# Altium PCB SDA7123.PcbDoc
Units mil, origin at the board's own origin, x right, y up, seen from the top; angles counter-clockwise.
Board outline 1968.5 x 1771.65 mil, 2 copper layers (Top Layer, Bottom Layer); 23 components, 43 nets, 139 pads, 102 vias.
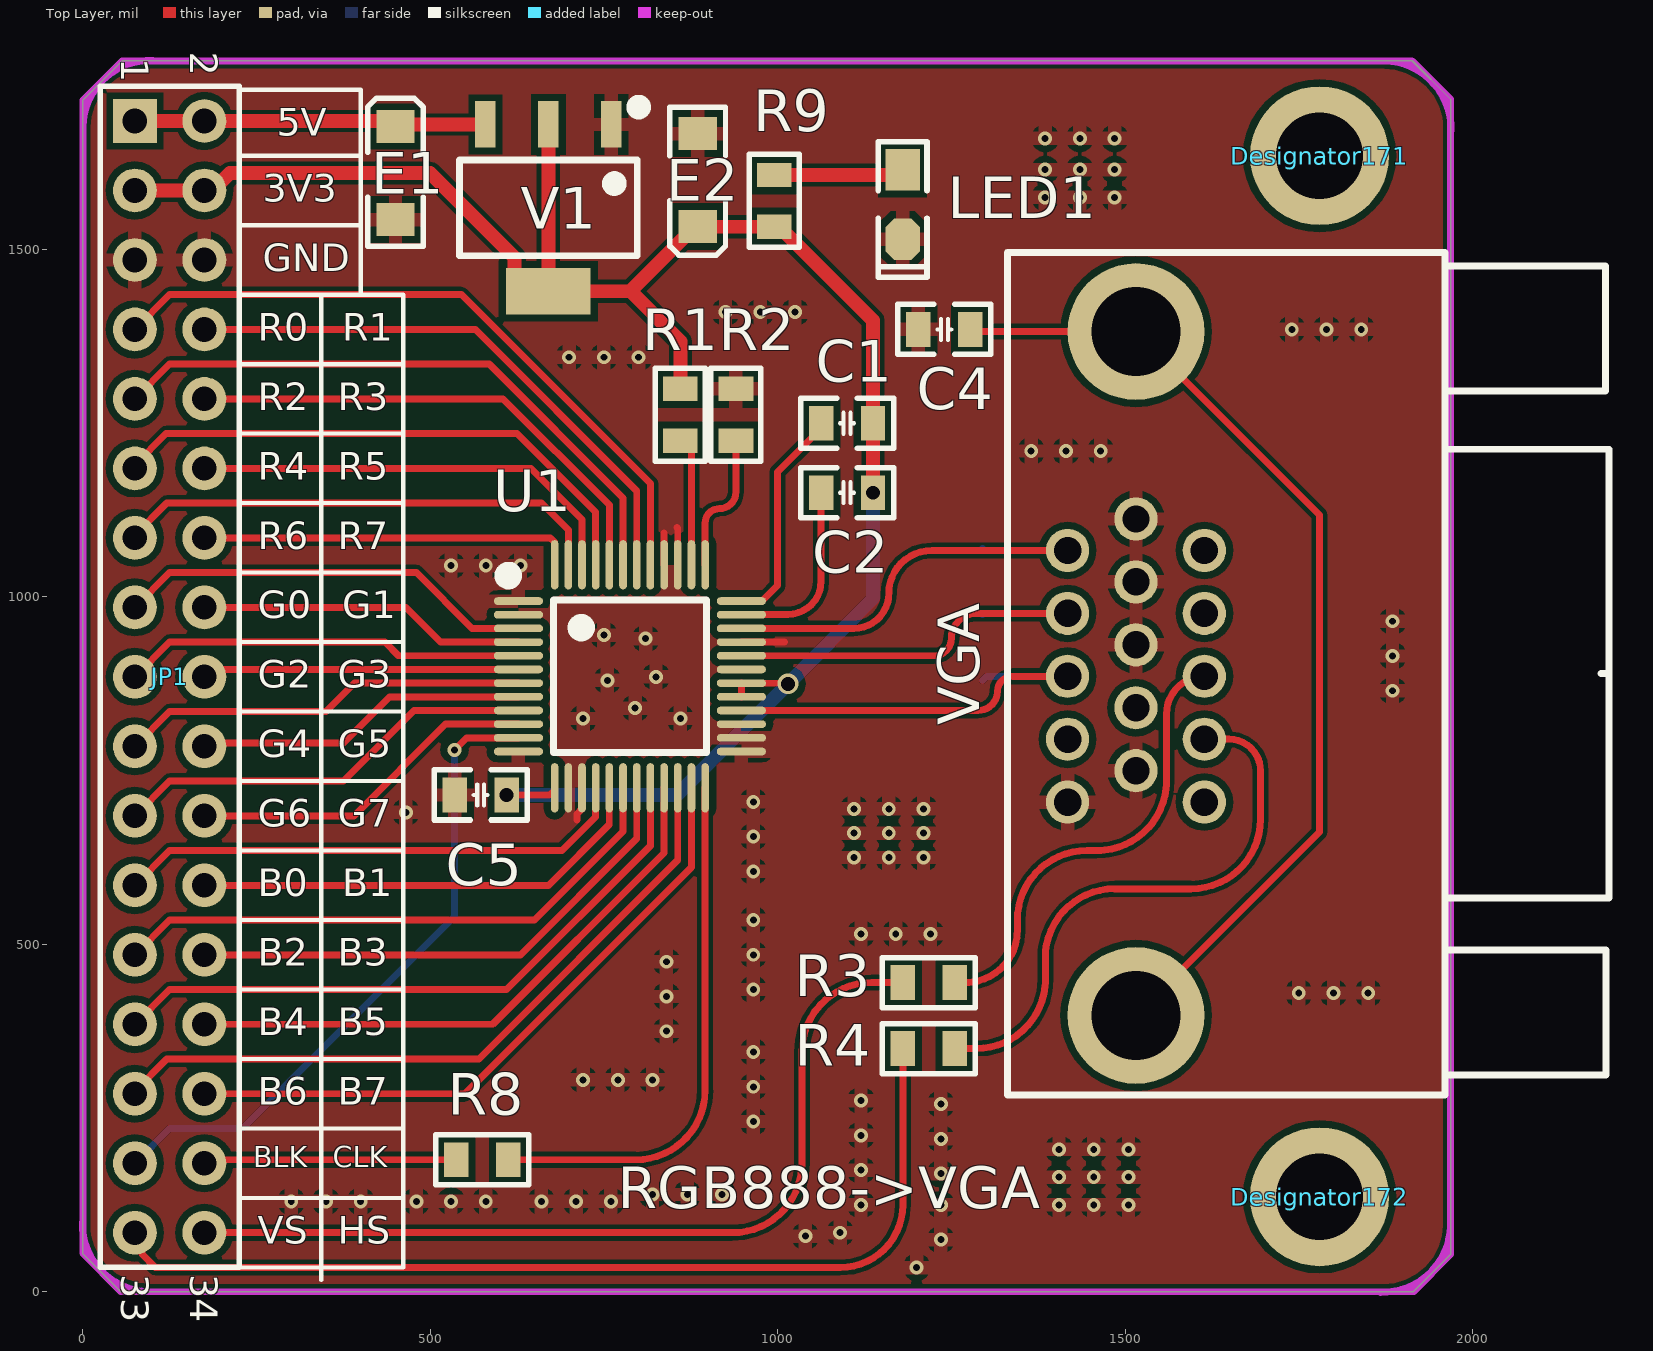
[diagram p0: Top Layer view]
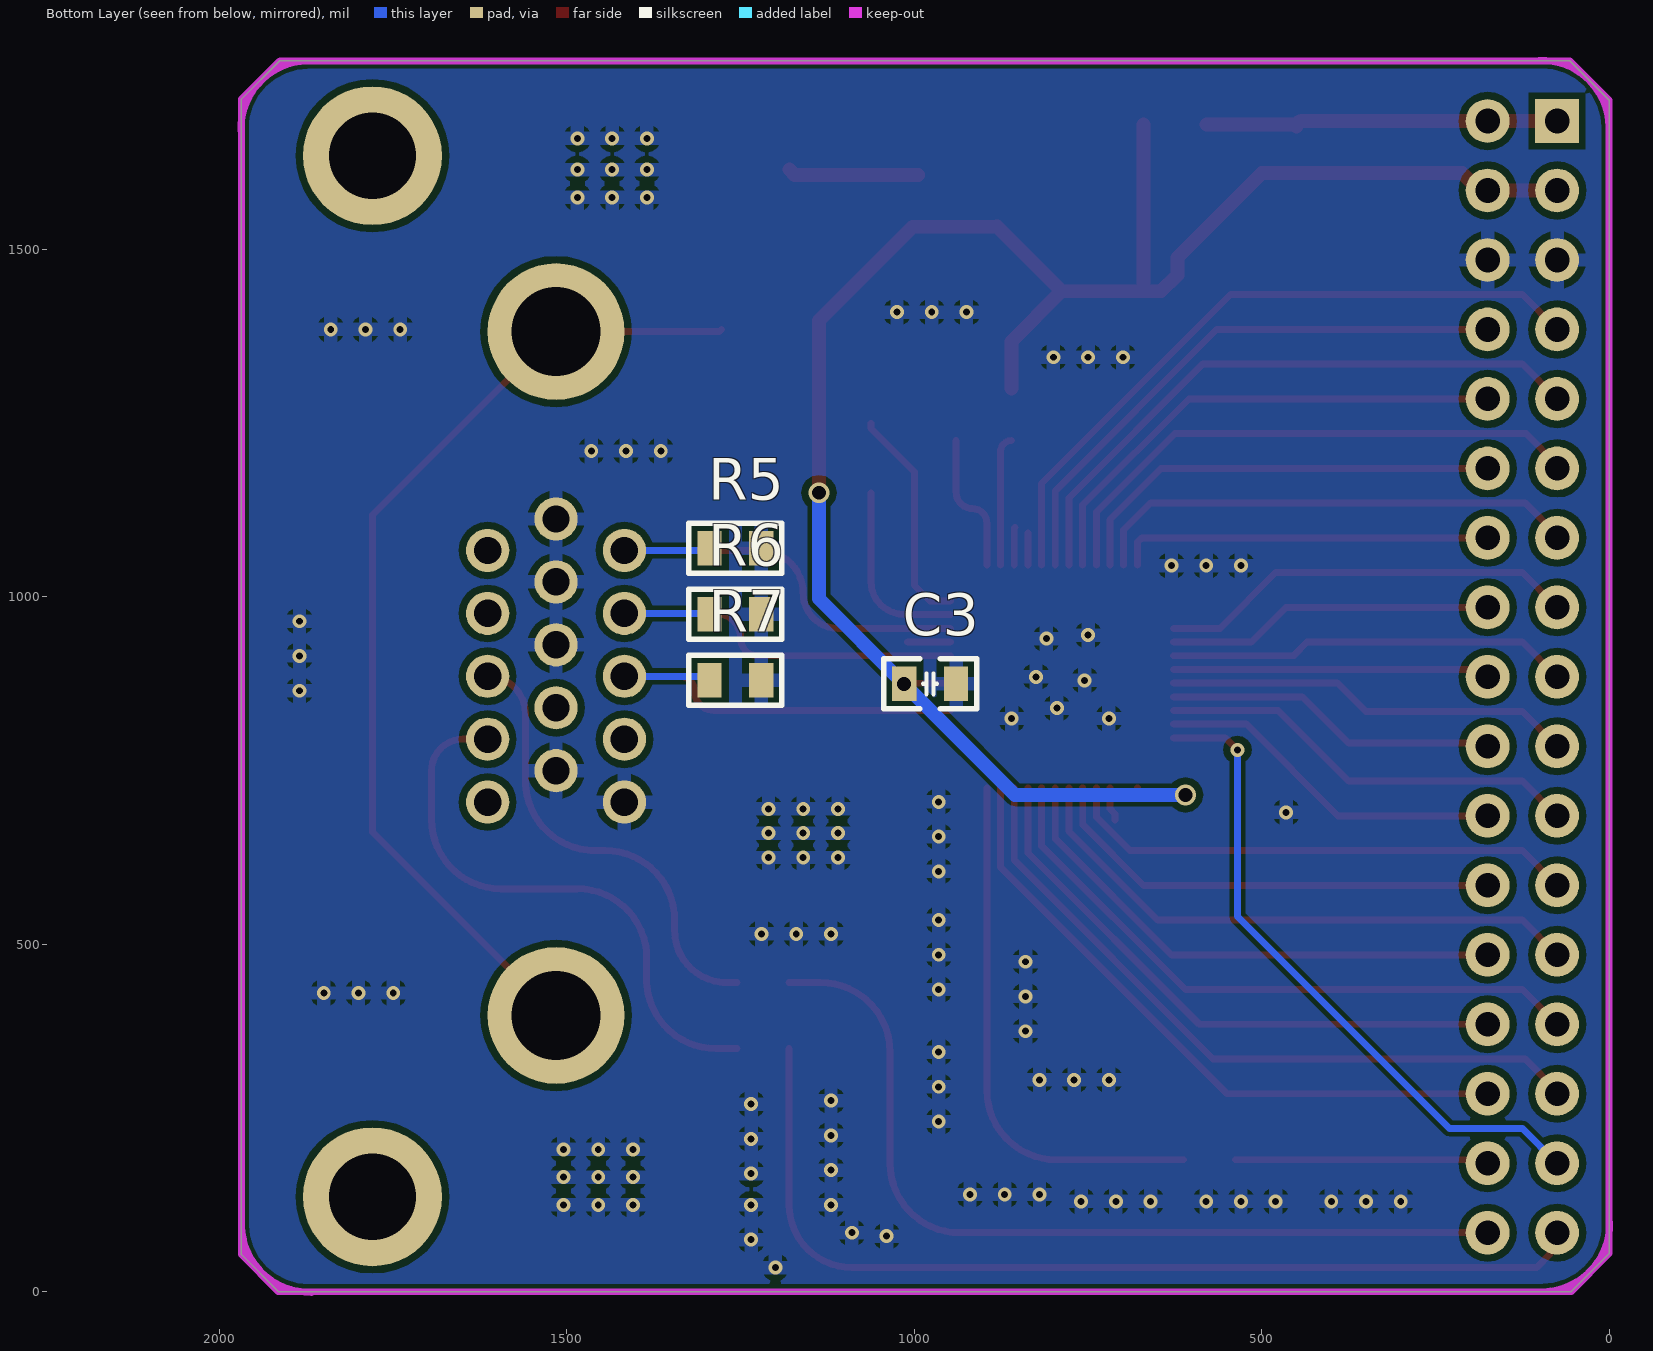
[diagram p1: Bottom Layer view, seen from below]

## Layer stack, top to bottom
Top Solder: solder mask 0.4, Solder Resist, Dk 3.5
Top Layer: signal copper 1.4
Dielectric 1: dielectric 12.6, FR-4, Dk 4.8
Bottom Layer: signal copper 1.4
Bottom Solder: solder mask 0.4, Solder Resist, Dk 3.5

## Board outline
0,55 55,0 1915,0 1968.5,53.5 1968.5,1716.5 1913.35,1771.65 56.65,1771.65 0,1715

## Design rules (kind name [scope] priority, off if disabled: settings)
Clearance [All] p1: gap=10 ignorepadtopadclearanceinfootprint=TRUE except(0: Arc-Hole Track-Hole SMDPad-Hole THPad-Hole Via-Hole Fill-Hole Poly-Hole Region-Hole Text-Hole; 6: Arc-Arc Arc-Track Arc-SMDPad Arc-THPad Arc-Via Arc-Fill Arc-Poly Arc-Region Arc-Text Track-Track Track-SMDPad Track-THPad Track-Via Track-Fill Track-Poly Track-Region Track-Text)
PlaneConnect [All] p1: planeconnectstyle=Relief reliefexpansion=20 reliefentries=4 reliefconductorwidth=20 reliefairgap=10
PolygonConnect [All] p1: connectstyle=Relief reliefconductorwidth=20 reliefentries=4 polygonreliefangle="90 Angle" airgapwidth=10
RoutingVias [All] p1: holewidth=28 width=50 viastyle="Through Hole" minholewidth=28 minwidth=50 maxholewidth=28 maxwidth=50
SolderMaskExpansion [All] p1: expansion=4 istentingtop=FALSE
Width [All] p1: maxlimit=100 minlimit=10 preferedwidth=10
29 further rules are at their usual default settings.

## Classes and differential pairs
component class SDA7123: C1 C2 C3 C4 C5 E1 E2 JP1 LED1 R1 R2 R3 R4 R5 R6 R7 R8 R9 U1 V1 VGA

## Components (designator, comment, footprint, x,y, rotation, side; value= is the part's Value field where it differs from the comment)
C1 "104" "C 0805_L" 1100,1250 r0 top
C2 "104" "C 0805_L" 1100,1150 r0 top
C3 "104" "C 0805_L" 977.4,875 r0 bottom
C4 "104" "C 0805_L" 1240,1385 r180 top
C5 "104" "C 0805_L" 572.6,715 r180 top
Designator171 "Comment" "M3 125X200" 1780,1635 r0 top
Designator172 "Comment" "M3 125X200" 1780,136.65 r0 top
E1 "10uF/6.3V" "CD A(3216)" 450,1610 r270 top
E2 "10uF/6.3V" "CD A(3216)" 885,1600 r90 top
JP1 "Header 2X11" HDR2.54-LI-2x17P 125,885 r270 top locked
LED1 "红色" "LED 0805B" 1180,1565 r270 top
R1 "4.7k" "R 0805_L" 860,1262.4 r90 top
R2 "510" "R 0805_L" 940,1262.4 r90 top
R3 "75R" "R 0805_L" 1217.6,445 r0 top
R4 "75R" "R 0805_L" 1217.6,350 r0 top
R5 "75R" "R 0805_L" 1257.6,1070 r0 bottom
R6 "75R" "R 0805_L" 1257.6,975 r0 bottom
R7 "75R" "R 0805_L" 1257.6,880 r0 bottom
R8 "33R" "R 0805_L" 575,190 r180 top
R9 "1k" "R 0805_L" 995,1570 r90 top
U1 "SDA7123" "LQFP48 7X7_N" 787.4,885.83 r270 top locked
V1 "AMS1117-3V3" SOT223_L 670,1560 r180 top
VGA "D Connector 15" VGA15b 1417.32,885.83 r270 top locked (schematic designator J1)

## Footprints (in the part's own frame and the unit in brackets; to place one, negate y for a bottom-side part, rotate by r counter-clockwise, add the part's x,y. Pads: shape width x height; smd on the part's side, far side on the other; paste and mask are expansions set on the pad)
"C 0805_L" [mil] "无极性贴片电容                                        淘宝ID:黄晶宝石"
  rect 35x50 smd: 1(-37.4,0) 2(37.4,0)
  silkscreen extent -67,-36 67,36, body extent -39,-24 39,24, height 20
"CD A(3216)" [mm] "长3.2mm，宽1.6mm，厚1.6mm      淘宝ID:黄晶宝石"
  rect 1.2x1.4 smd: 1(-1.7,0) 2(1.7,0)
  silkscreen extent -2.74,-1.02 2.67,1.02, body extent -1.6,-0.8 1.6,0.8, height 1.6
HDR2.54-LI-2x17P [mm] "双排排针，17x2脚  淘宝ID:黄晶宝石   店铺网址:https://shop463601444.taobao.com"
  rect 1.6x1.6 hole 0.9: 1(-20.32,-1.27)
  round 1.6 hole 0.9: 2(-20.32,1.27) 3(-17.78,-1.27) 4(-17.78,1.27) 5(-15.24,-1.27) 6(-15.24,1.27) 7(-12.7,-1.27) 8(-12.7,1.27) 9(-10.16,-1.27) 10(-10.16,1.27) 11(-7.62,-1.27) 12(-7.62,1.27) 13(-5.08,-1.27) 14(-5.08,1.27) 15(-2.54,-1.27) 16(-2.54,1.27) 17(0,-1.27) 18(0,1.27) 19(2.54,-1.27) 20(2.54,1.27) 21(5.08,-1.27) 22(5.08,1.27) 23(7.62,-1.27) 24(7.62,1.27) 25(10.16,-1.27) 26(10.16,1.27) 27(12.7,-1.27) 28(12.7,1.27) 29(15.24,-1.27) 30(15.24,1.27) 31(17.78,-1.27) 32(17.78,1.27) 33(20.32,-1.27) 34(20.32,1.27)
  silkscreen extent -21.59,-2.54 21.59,2.54, body extent -21.59,-2.54 21.59,2.54, height 8.5
"LED 0805B" [mil] "蓝色0805LED                                    淘宝ID:黄晶宝石"
  rect 60x50 smd: 1(-50,0)
  oct 60x50 smd: 2(50,0)
  silkscreen extent -90,-35 105,35, body extent -39,-25 39,25, height 32
"LQFP48 7X7_N" [mm] "48脚，体宽7x7mm，脚距0.5mm"
  oval 0.279x1.8 smd: 1(-2.75,-4.075) 2(-2.25,-4.075) 3(-1.75,-4.075) 4(-1.25,-4.075) 5(-0.75,-4.075) 6(-0.25,-4.075) 7(0.25,-4.075) 8(0.75,-4.075) 9(1.25,-4.075) 10(1.75,-4.075) 11(2.25,-4.075) 12(2.75,-4.075) 25(2.75,4.075) 26(2.25,4.075) 27(1.75,4.075) 28(1.25,4.075) 29(0.75,4.075) 30(0.25,4.075) 31(-0.25,4.075) 32(-0.75,4.075) 33(-1.25,4.075) 34(-1.75,4.075) 35(-2.25,4.075) 36(-2.75,4.075)
  oval 1.8x0.279 smd: 13(4.075,-2.75) 14(4.075,-2.25) 15(4.075,-1.75) 16(4.075,-1.25) 17(4.075,-0.75) 18(4.075,-0.25) 19(4.075,0.25) 20(4.075,0.75) 21(4.075,1.25) 22(4.075,1.75) 23(4.075,2.25) 24(4.075,2.75) 37(-4.075,2.75) 38(-4.075,2.25) 39(-4.075,1.75) 40(-4.075,1.25) 41(-4.075,0.75) 42(-4.075,0.25) 43(-4.075,-0.25) 44(-4.075,-0.75) 45(-4.075,-1.25) 46(-4.075,-1.75) 47(-4.075,-2.25) 48(-4.075,-2.75)
  silkscreen extent -3.93,-4.69 2.79,2.79, body extent -4.5,-4.5 4.5,4.5, height 1.45
"M3 125X200" [mil] "M3螺丝孔，孔125Mil，焊盘200Mil"
  round 200 hole 125: 1(0,0)
"R 0805_L" [mil] "1/8W贴片电阻"
  rect 35x50 smd: 1(-37.4,0) 2(37.4,0)
  silkscreen extent -67,-36 67,36, body extent -39,-25 39,25, height 20
SOT223_L [mm] "6.4x7x1.6mm(长宽高)"
  rect 0.75x1.7 smd: 1(-2.3,-3.048) 2(0,-3.048) 3(2.3,-3.048)
  rect 3.1x1.7 smd: 2(0,3.048)
  silkscreen extent -3.5,-3.88 3.25,1.75, body extent -3.25,-3.51 3.25,3.51, height 1.65
VGA15b [mm] "15针通讯接口"
  round 1.58 hole 1: 1(-4.6,0) 2(-2.3,0) 3(0,0) 4(2.3,0) 5(4.6,0) 6(-5.75,2.5) 7(-3.45,2.5) 8(-1.15,2.5) 9(1.15,2.5) 10(3.45,2.5) 11(-4.6,5) 12(-2.3,5) 13(0,5) 14(2.3,5) 15(4.6,5)
  round 5 hole 3.25: 16(-12.6,2.5) 17(12.4,2.5)
  silkscreen extent -15.5,-2.2 15.3,19.8, body extent -15.66,-0.87 15.15,20.23, height 12.77

## Part data
C1 C2 C3 C4 C5: library part C, "贴片电容", BOM名称=无极性贴片电容, 联系售后=https://shop463601444.taobao.com, 淘宝ID="封装库来自淘宝 ID：黄晶宝石"
E1 E2: library part CT, "贴片钽电容", BOM名称=贴片钽电容, 联系售后=https://shop463601444.taobao.com, 淘宝ID="封装库来自淘宝 ID：黄晶宝石"
JP1: library part "Header 17X2", "17*2P接插件", BOM名称=17*2P接插件, 版权归属="封装库来自淘宝 ID：黄晶宝石", 学习资源=https://shop463601444.taobao.com
LED1: library part LED-SMD, "贴片LED", BOM名称=贴片LED, 版权归属="封装库来自淘宝 ID：黄晶宝石", 学习资源=https://shop463601444.taobao.com
R1 R2 R3 R4 R5 R6 R7 R8 R9: library part R, "贴片电阻", BOM名称=贴片电阻, 版权归属="来自淘宝 ID：黄晶宝石", 联系售后=https://shop463601444.taobao.com
V1: library part AMS1117, "三端稳压芯片", BOM名称=稳压芯片, 欢迎光临淘宝店铺=https://shop463601444.taobao.com, 淘宝ID="封装库来自淘宝 ID：黄晶宝石"
VGA: "VGA通讯端口", BOM名称=VGA通讯端口, 版权归属="封装库来自淘宝 ID：黄晶宝石", 学习资源=https://shop463601444.taobao.com

## Via types
v1: diameter 20, hole 10, Top Layer to Bottom Layer, tented both sides, 99 vias
v2: diameter 30, hole 20, Top Layer to Bottom Layer, tented both sides, 3 vias

## Nets (pads, with @x,y where several pads share a name; then routed paths per layer and width w, separated by ;. In a path a pad name is that pad's centre, name@x,y a point inside that pad or via, vN(x,y) a via of type N, cw(c..) or ccw(c..) an arc to the next point about the centre after c; other vN are vias at no path point)
3V3: C1.2 C2.2 C3.2 C5.1 E2.1 JP1.3 JP1.4 R1.2 R9.1 U1.13 U1.29 U1.30 V1.2 | length 2869.4
  Top Layer w10: v2(610,715) 668.76,715 ccw(c668.76,725.38) U1.13 ; U1.29 U1.30 948.04,875.79 1014.21,875.79 v2(1015,875)
  Top Layer w20: JP1.3 186.63,1585 211.63,1610 500,1610 621.54,1488.46 621.54,1463.46 645.01,1440 V1.2@670,1440 ; V1.2@670,1680 V1.2@670,1440 ; R1.2 860,1367.99 787.99,1440 ; v2(1137.4,1150) C1.2 1137.4,1397.7 1002.27,1532.83 881.3,1532.83 881.06,1533.07 787.99,1440 ; V1.2@670,1440 787.99,1440
  Bottom Layer w20: v2(610,715) 855,715 v2(1015,875) 1137.4,997.4 v2(1137.4,1150)
+5: E1.1 JP1.1 JP1.2 V1.3 | length 510.8
  Top Layer w20: JP1.1 JP1.2 441.93,1685 cw(c441.93,1676.93) E1.1 cw(c453.07,1676.93) 453.07,1680 V1.3
B0: JP1.23 U1.16 | length 746
  Top Layer w10: JP1.23 125,635 690,635 738.19,683.19 U1.16
B1: JP1.24 U1.17 | length 671.8
  Top Layer w10: JP1.24 670,585 757.68,672.68 757.68,725.19 U1.17
B2: JP1.25 U1.18 | length 838.9
  Top Layer w10: JP1.25 125,535 650,535 777.56,662.56 U1.18
B3: JP1.26 U1.19 | length 764.7
  Top Layer w10: JP1.26 630,485 797.24,652.24 U1.19
B4: JP1.27 U1.20 | length 931.8
  Top Layer w10: JP1.27 125,435 610,435 816.74,641.74 816.74,725.19 U1.20
B5: JP1.28 U1.21 | length 857.5
  Top Layer w10: JP1.28 590,385 836.42,631.42 836.42,725.19 U1.21
B6: JP1.29 U1.22 | length 1027.1
  Top Layer w10: JP1.29 75,289.14 120.86,335 570,335 856.3,621.3 U1.22
B7: JP1.30 U1.23 | length 950.4
  Top Layer w10: JP1.30 550,285 875.98,610.98 U1.23
BLK: JP1.31 U1.11 | length 946.1
  Top Layer w10: v1(535,780) 552.24,797.24 U1.11
  Bottom Layer w10: JP1.31 125,235 230,235 535,540 v1(535,780)
CLK: JP1.32 R8.2 | length 365.5
  Top Layer w10: JP1.32 cw(c180,185) 180,190 R8.2
G0: JP1.15 U1.3 | length 605.9
  Top Layer w10: JP1.15 125,1035 480,1035 560.28,954.72 U1.3
G1: JP1.16 U1.4 | length 472.6
  Top Layer w10: JP1.16 465,985 514.96,935.04 U1.4
G2: JP1.17 U1.5 | length 580.8
  Top Layer w10: JP1.17 125,935 435,935 454.65,915.35 U1.5
G3: JP1.18 U1.6 | length 456.4
  Top Layer w10: JP1.18 189.34,885 200.01,895.67 U1.6
G4: JP1.19 U1.7 | length 589.6
  Top Layer w10: JP1.19 125,835 350,835 390.98,875.98 U1.7
G5: JP1.20 U1.8 | length 481.5
  Top Layer w10: JP1.20 180,790 375,790 441.3,856.3 U1.8
G6: JP1.21 U1.9 | length 614.8
  Top Layer w10: JP1.21 125,735 375,735 476.61,836.61 U1.9
G7: JP1.22 U1.10 | length 506.6
  Top Layer w10: JP1.22 390.25,685 522.18,816.93 U1.10
GND: C3.1 C4.2 C5.2 E1.2 E2.2 JP1.5 JP1.6 LED1.2 R2.2 R5.1 R6.1 R7.1 U1.1 U1.2 U1.12 U1.14 U1.15 U1.25 U1.26 U1.27 U1.31 U1.33 U1.39 U1.40 V1.1 VGA.5 VGA.6 VGA.7 VGA.8 VGA.10 | length 211.9
  Top Layer w10: 711.1,678.73 711.1,687.77 718.5,695.17 U1.15 ; U1.40 836.61,1092.01 ; 855,1100 856.3,1098.7 U1.39 ; U1.33 1009.96,935.04 1010,935
  other v1: 1200,35 1235,75 1040,80 1090,85 1120,125 1235,125 1405,125 1455,125 1505,125 300,130 350,130 400,130 480,130 530,130 580,130 660,130 710,130 760,130 820,140 870,140 920,140 1405,165 1455,165 1505,165 1235,170 1120,175 1405,205 1455,205 1505,205 1235,220 1120,225 965,245 1235,270 1120,275 965,295 720,305 770,305 820,305 965,345 840,375 840,425 1750,430 1800,430 1850,430 965,435 840,475 965,485 1120,515 1170,515 1220,515 965,535 965,605 1110,625 1160,625 1210,625 965,655 1110,660 1160,660 1210,660 465,690 1110,695 1160,695 1210,695 965,705 720,825 860,825 795,840 1885,865 755,880 825,885 1885,915 810,940 750,945 1885,965 530,1045 580,1045 630,1045 1365,1210 1415,1210 1465,1210 700,1345 750,1345 800,1345 1740,1385 1790,1385 1840,1385 925,1410 975,1410 1025,1410 1385,1575 1435,1575 1485,1575 1385,1615 1435,1615 1485,1615 1385,1660 1435,1660 1485,1660
NetC1_1: C1.1 U1.36 | length 321
  Top Layer w10: U1.36 977.78,994.09 1000,1016.31 1000,1179.9 1062.6,1242.5 C1.1
NetC2_1: C2.1 U1.35 | length 269.9
  Top Layer w10: U1.35 947.85,975 1015,975 ccw(c1015,1022.6) 1062.6,1022.6 C2.1
NetC4_1: C4.1 VGA.16 VGA.17 | length 1442.8
  Top Layer w10: C4.1 1280.52,1381.89 VGA.16 1780,1117.64 1780,661.89 VGA.17
NetJ1_1: R5.2 U1.34 VGA.1 | length 657.1
  Top Layer w10: U1.34 1109.72,954.72 ccw(c1109.72,1005) 1160,1005 cw(c1221.93,1005) 1221.93,1066.93 VGA.1
  Bottom Layer w10: R5.2 1298.07,1066.93 VGA.1
NetJ1_2: R6.2 U1.32 VGA.2 | length 627.2
  Top Layer w10: U1.32 1225.35,915.35 ccw(c1225.35,940) 1250,940 cw(c1286.38,940) 1286.38,976.38 VGA.2
  Bottom Layer w10: R6.2 1296.38,976.38 VGA.2
NetJ1_3: R7.2 U1.28 VGA.3 | length 622.3
  Top Layer w10: U1.28 1288.61,836.61 ccw(c1288.61,864.51) 1315,855.49 ccw(c1288.61,864.51) 1316.5,864.51 cw(c1337.82,864.51) 1337.82,885.83 VGA.3
  Bottom Layer w10: R7.2 1300.83,885.83 VGA.3
NetJ1_13: R3.2 VGA.13 | length 658.5
  Top Layer w10: R3.2 1270,445 ccw(c1270,520) 1280.78,445.78 ccw(c1270,520) 1344.22,509.22 ccw(c1270,520) 1345,520 1345,535 cw(c1445,535) 1445,635 1459.59,635 ccw(c1459.59,735) 1470.61,635.61 ccw(c1459.59,735) 1558.98,723.98 ccw(c1459.59,735) 1559.59,735 1559.59,831.25 cw(c1614.17,831.25) VGA.13
NetJ1_14: R4.2 VGA.14 | length 818.4
  Top Layer w10: R4.2 1285.55,350 ccw(c1285.55,450) 1385,439.53 ccw(c1285.55,450) 1385.55,450 1385.55,490.47 cw(c1485,480) 1485,580 1595,580 ccw(c1595,680) 1695,680 1695,750 ccw(c1649.73,750) 1689.49,771.64 ccw(c1649.73,750) 1649.73,795.27 VGA.14
NetLED1_1: LED1.1 R9.2 | length 188.1
  Top Layer w20: R9.2 1172.4,1607.4 LED1.1
NetR1_1: R1.1 U1.38 | length 187.8
  Top Layer w10: R1.1 cw(c860,1209.02) 875.98,1209.02 U1.38
NetR2_1: R2.1 U1.37 | length 204
  Top Layer w10: U1.37 895.67,1106.54 cw(c916.25,1106.54) 901.7,1121.1 cw(c916.25,1106.54) 916.25,1127.13 ccw(c916.25,1150.87) 940,1150.87 R2.1
NetR8_1: R8.1 U1.24 | length 775.7
  Top Layer w10: R8.1 795.67,190 ccw(c795.67,290) 895.67,290 U1.24
R0: JP1.7 U1.41 | length 992.1
  Top Layer w10: JP1.7 125,1435 545,1435 816.93,1163.07 U1.41
R1: JP1.8 U1.42 | length 824.9
  Top Layer w10: JP1.8 565,1385 797.24,1152.76 U1.42
R2: JP1.9 U1.43 | length 899.2
  Top Layer w10: JP1.9 125,1335 585,1335 777.56,1142.44 U1.43
R3: JP1.10 U1.44 | length 732
  Top Layer w10: JP1.10 605,1285 757.87,1132.13 U1.44
R4: JP1.11 U1.45 | length 809.2
  Top Layer w10: JP1.11 75,1190 120,1235 625,1235 738,1122 738,1046.47 U1.45
R5: JP1.12 U1.46 | length 639.2
  Top Layer w10: JP1.12 645,1185 718.31,1111.69 718.31,1046.47 U1.46
R6: JP1.13 U1.47 | length 712.9
  Top Layer w10: JP1.13 75,1089.14 120.86,1135 660,1135 698.82,1096.18 U1.47
R7: JP1.14 U1.48 | length 539.1
  Top Layer w10: JP1.14 672.78,1085 678.94,1078.83 678.94,1046.47 U1.48
VGA_HS: JP1.34 R3.1 | length 1279.4
  Top Layer w10: JP1.34 935,85 ccw(c935,185) 1035,185 1035,345 cw(c1135,345) 1135,445 R3.1
VGA_VS: JP1.33 R4.1 | length 1414.4
  Top Layer w10: JP1.33 85.14,74.86 85.14,54.15 104.29,35 1090.2,35 ccw(c1090.2,125) 1180.2,125 R4.1
pads on no net: Designator171.1 Designator172.1 VGA.4 VGA.9 VGA.11 VGA.12 VGA.15

## Polygon pours and split planes (outlines as drawn)
GND on Bottom Layer "NONET_L01_P-001" (solid, remove dead copper, pour order 0): -60,1920 -70,1910 -70,-185 2360,-185 2365,-190 2430,-125 2430,2025
GND on Top Layer "NONET_L01_P-001" (solid, remove dead copper, pour order 1): -130,1970 -130,-195 -30,-295 10,-255 2385,-255 2385,1880 2315,1950

## Keep-outs
Keep-Out Layer:
  lines w10: -0.75,100.01 ccw(c97.66,98.39) 95,0 ; 0,1676.65 cw(c98.39,1673.99) 101.05,1772.38 ; 1867.46,-0.73 ccw(c1870.11,97.66) 1968.5,95 ; 1873.5,1771.65 cw(c1870.84,1673.26) 1969.23,1670.61 ; 0,55 55,0 1915,0 1968.5,53.5 1968.5,1716.5 1913.35,1771.65 56.65,1771.65 0,1715 0,55

## Silkscreen, mask and mechanical layers (free items; w line width, h text height)
Top Overlay:
  lines w5.98: 225,35 461.22,35 ; 225,135 461.22,135 ; 225,235 461.22,235 ; 225,335 461.22,335 ; 225,435 461.22,435 ; 225,535 461.22,535 ; 225,635 461.22,635 ; 225,735 461.22,735 ; 225,835 461.22,835 ; 225,935 461.22,935 ; 225,1035 461.22,1035 ; 225,1135 461.22,1135 ; 225,1235 461.22,1235 ; 225,1335 461.22,1335 ; 225,1435 461.22,1435 ; 225,1535 400,1535 ; 225,1635 400,1635 ; 225,1730 400,1730
  lines w6: 343.11,16.89 343.11,35 343.11,1435 ; 400,1435 400,1730 ; 461.22,35 461.22,1435
  text "5V" at 279.18,1664.01 h40
  text "3V3" at 259.18,1569.01 h40
  text "GND" at 259.18,1469.01 h40
  text "R0" at 251.68,1369.01 h40
  text "R1" at 373.34,1369.01 h40
  text "R2" at 251.68,1269.01 h40
  text "R3" at 366.68,1269.01 h40
  text "R4" at 251.68,1169.01 h40
  text "R5" at 366.68,1169.01 h40
  text "R6" at 251.68,1069.01 h40
  text "R7" at 366.68,1069.01 h40
  text "G0" at 251.68,969.01 h40
  text "G1" at 373.34,969.01 h40
  text "G2" at 251.68,869.01 h40
  text "G3" at 366.68,869.01 h40
  text "G4" at 251.68,769.01 h40
  text "G5" at 366.68,769.01 h40
  text "G6" at 251.68,669.01 h40
  text "G7" at 366.68,669.01 h40
  text "B0" at 251.68,569.01 h40
  text "B1" at 373.34,569.01 h40
  text "B2" at 251.68,469.01 h40
  text "B3" at 366.68,469.01 h40
  text "B4" at 251.68,369.01 h40
  text "B5" at 366.68,369.01 h40
  text "B6" at 251.68,269.01 h40
  text "B7" at 366.68,269.01 h40
  text "BLK" at 245.01,179.01 h30
  text "CLK" at 360.01,179.01 h30
  text "RGB888->VGA" at 770.1,120.02 h60
  text "VS" at 251.68,69.01 h40
  text "HS" at 366.68,69.01 h40

## Text inside footprints (layer, text, board x,y; h text height)
JP1: Top Overlay "2" at 155,1785 h40 r270; Top Overlay "1" at 55,1775 h40 r270; Top Overlay "33" at 55,25 h40 r270; Top Overlay "34" at 155,25 h40 r270